# EAGLE board Spring2020 (EAGLE 9.6.2)
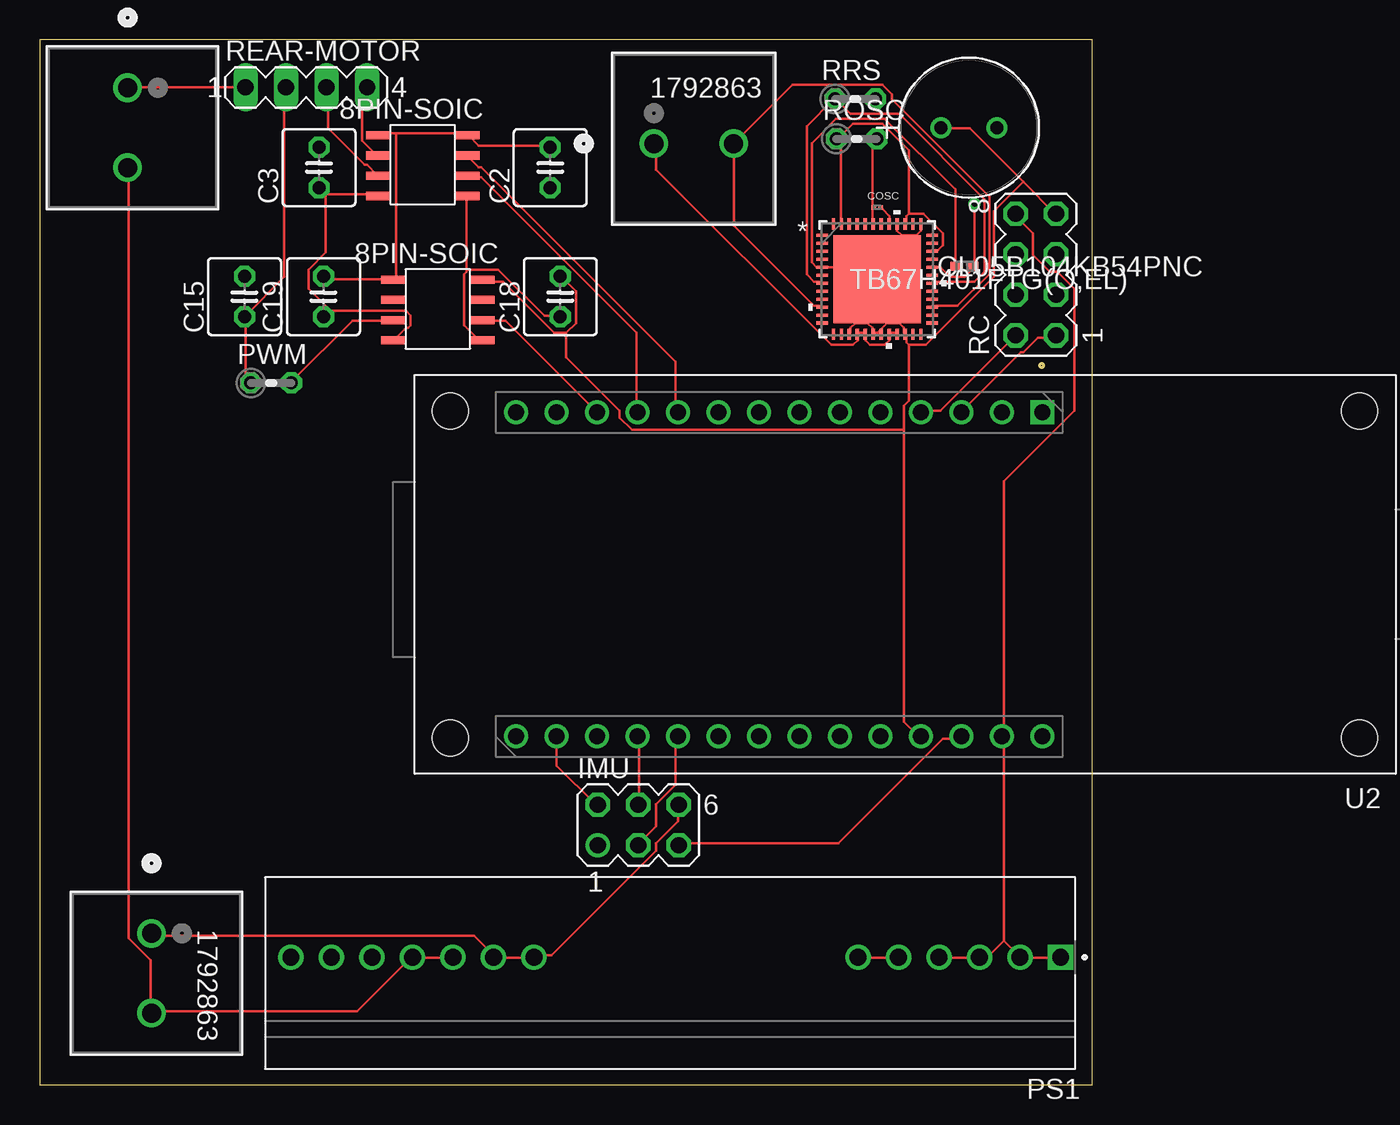
[diagram p0: board, top side]
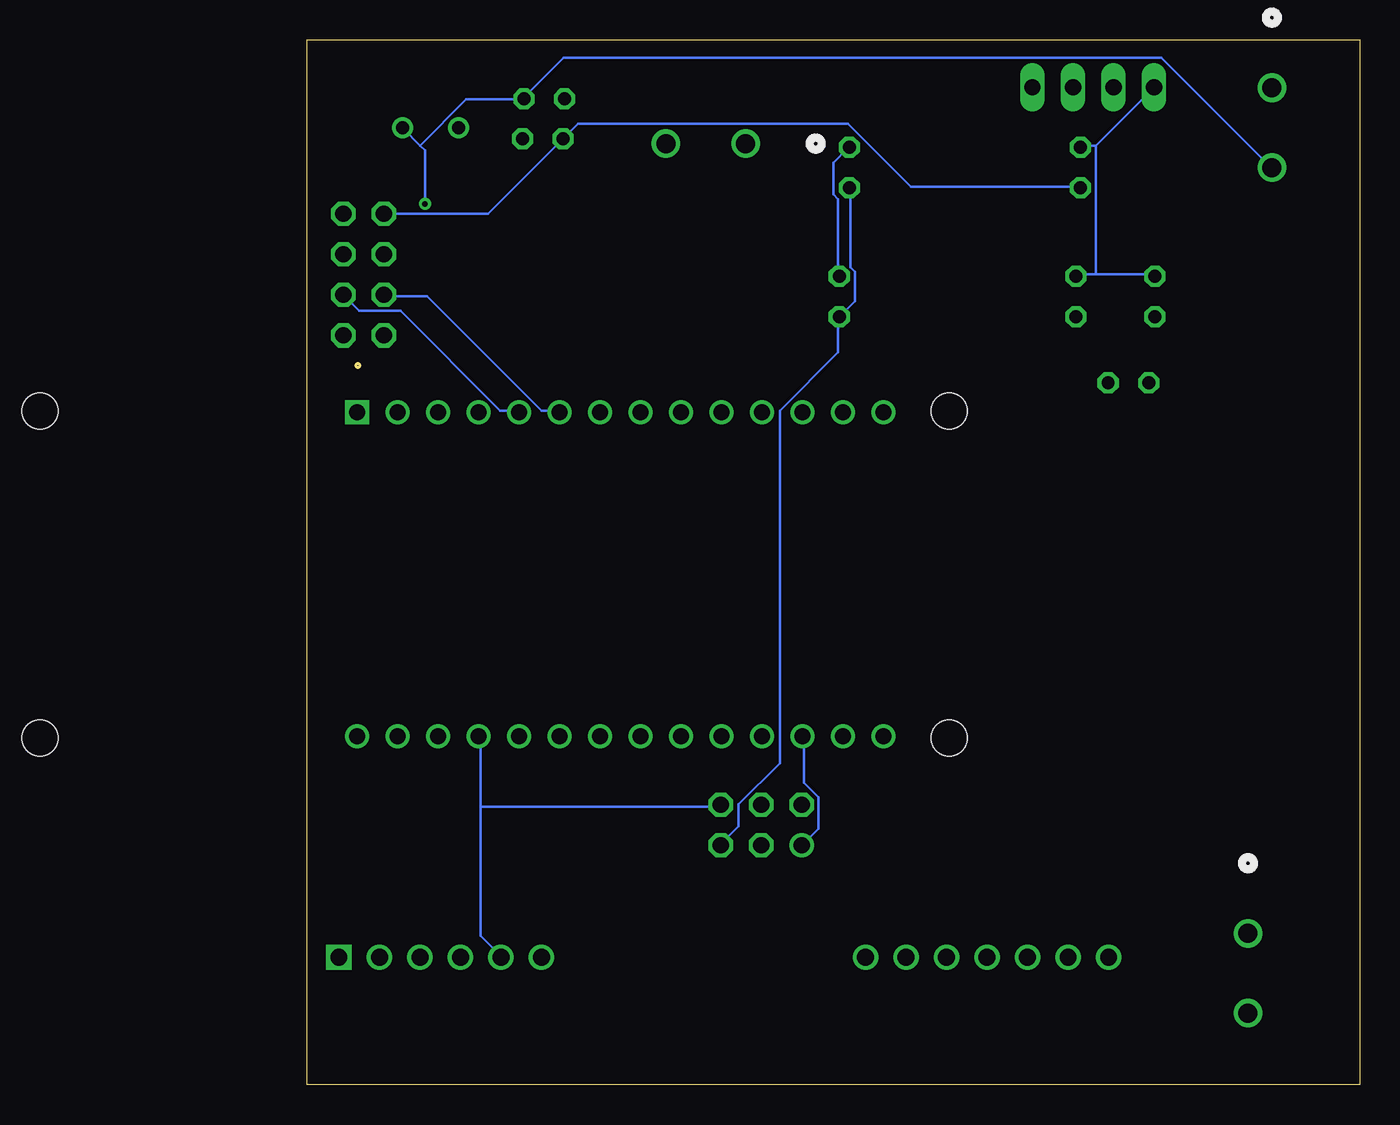
[diagram p1: board, bottom side, seen from below]

Size 66 x 65.5 mm. Coordinates in mm from the lower left corner, seen from the top.
Outline: 0,0 66,0 66,65.5 0,65.5 0,0
Copper layers (1*16): Top 0.035mm / dielectric 1.5mm / Bottom 0.035mm
Design rules "default": minimum track width 6mil, minimum drill 0.35mm, track to track 6mil, track to pad 6mil, pad to pad 6mil, via to via 6mil, smd to smd 6mil, copper to edge 40mil, drill to drill 6mil, minimum pad ring 10mil, minimum via ring 8mil, stop-mask expansion 4mil, vias tented up to drill 0mil, thermal gap 10mil

## Footprints (pad centres in the part's own frame; a part is rotated, then mirrored left to right if it is on the bottom)
C025-050X050 = drill 0.813 octagon: 1 -1.27,0; 2 1.27,0
CAPC0402X22N = smd 0.29 x 0.3: 1 -0.222,0; 2 0.222,0
CAP_4014_WRE = drill 0.813 pad 1.321: 1 0,0; 2 3.505,0
CAP_CL_05_SAM = smd 0.711 x 0.559: 1 -0.521,0; 2 0.521,0
CONN_1792863_PXC = drill 1.194 pad 1.702: 1 0,0; 2 5.004,0
MA03-2 = drill 1.016: 1 -2.54,-1.27 | drill 1.016 octagon: 2 -2.54,1.27; 3 0,-1.27; 4 0,1.27; 5 2.54,-1.27; 6 2.54,1.27
CONV_NID100-5 = drill 1.06 square: 1 0,0 | drill 1.06: 2 2.54,0; 3 5.08,0; 4 7.62,0; 5 10.16,0; 6 12.7,0; 7 33.02,0; 8 35.56,0; 9 38.1,0; 10 40.64,0; 11 43.18,0; 12 45.72,0; 13 48.26,0
0204V = drill 0.813 octagon: 1 -1.27,0; 2 1.27,0
RESC0402X15N = smd 0.29 x 0.3: 1 -0.222,0; 2 0.222,0
MA04-2 = drill 1.016 octagon: 1 -3.81,-1.27; 2 -3.81,1.27; 3 -1.27,-1.27; 4 -1.27,1.27; 5 1.27,-1.27; 6 1.27,1.27; 7 3.81,-1.27; 8 3.81,1.27
MA04-1 = drill 1.016 long: 1 -3.81,0; 2 -1.27,0; 3 1.27,0; 4 3.81,0
P-VQFN48-0707-0P50-004_TOS = smd 0.705 x 0.199: 1 -3.452,2.75; 2 -3.452,2.25; 3 -3.452,1.75; 4 -3.452,1.25; 5 -3.452,0.75; 6 -3.452,0.25; 7 -3.452,-0.25; 8 -3.452,-0.75; 9 -3.452,-1.25; 10 -3.452,-1.75; 11 -3.452,-2.25; 12 -3.452,-2.75; 25 3.452,-2.75; 26 3.452,-2.25; 27 3.452,-1.75; 28 3.452,-1.25; 29 3.452,-0.75; 30 3.452,-0.25; 31 3.452,0.25; 32 3.452,0.75; 33 3.452,1.25; 34 3.452,1.75; 35 3.452,2.25; 36 3.452,2.75 | smd 0.199 x 0.705: 13 -2.75,-3.452; 14 -2.25,-3.452; 15 -1.75,-3.452; 16 -1.25,-3.452; 17 -0.75,-3.452; 18 -0.25,-3.452; 19 0.25,-3.452; 20 0.75,-3.452; 21 1.25,-3.452; 22 1.75,-3.452; 23 2.25,-3.452; 24 2.75,-3.452; 37 2.75,3.452; 38 2.25,3.452; 39 1.75,3.452; 40 1.25,3.452; 41 0.75,3.452; 42 0.25,3.452; 43 -0.25,3.452; 44 -0.75,3.452; 45 -1.25,3.452; 46 -1.75,3.452; 47 -2.25,3.452; 48 -2.75,3.452 | smd 5.5 x 5.5: 49 0,0
ARDUINO_ABX00012 = drill 1 square: 1 22.135,2.34 | drill 1: 2 24.675,2.34; 3 27.215,2.34; 4 29.755,2.34; 5 32.295,2.34; 6 34.835,2.34; 7 37.375,2.34; 8 39.915,2.34; 9 42.455,2.34; 10 44.995,2.34; 11 47.535,2.34; 12 50.075,2.34; 13 52.615,2.34; 14 55.155,2.34; 15 55.155,22.66; 16 52.615,22.66; 17 50.075,22.66; 18 47.535,22.66; 19 44.995,22.66; 20 42.455,22.66; 21 39.915,22.66; 22 37.375,22.66; 23 34.835,22.66; 24 32.295,22.66; 25 29.755,22.66; 26 27.215,22.66; 27 24.675,22.66; 28 22.135,22.66 | hole 2.25: 2.25,2.25; 2.25,22.75; 59.25,22.75; 59.25,2.25
8PINSOIC = smd 1.524 x 0.508: 1 -2.794,2.286; 2 -2.794,1.016; 3 -2.794,-0.254; 4 -2.794,-1.524; 5 2.794,-1.524; 6 2.794,-0.254; 7 2.794,1.016; 8 2.794,2.286

## Placement (x,y rotation side)
C2  [C025-050X050]  32,57.5 90 top
C3  [C025-050X050]  17.5,57.5 90 top
C15  [C025-050X050]  12.83,49.41 90 top
C18  [C025-050X050]  32.63,49.41 90 top
C19  [C025-050X050]  17.78,49.41 90 top
COSC  GRM022R71A271KA01L  [CAPC0402X22N]  52.5,55 0 top
CVM1  860010674014  [CAP_4014_WRE]  56.5,60 0 top
CVM2  CL05B104KB54PNC  [CAP_CL_05_SAM]  57.98,51.3 0 top
FRT_MTR  1792863  [CONN_1792863_PXC]  38.5,59 0 top
IMU  [MA03-2]  37.52,16.29 0 top
PS1  NID100-5  [CONV_NID100-5]  64,8 180 top
PWM  68000  [0204V]  14.5,44 0 top
PWR_IN  1792863  [CONN_1792863_PXC]  7,9.5 270 top
R1  RC0100JR-075K1L  [RESC0402X15N]  -16,-6.5 0 top  (outside the outline)
RC  [MA04-2]  62.45,50.79 90 top
REAR-MOTOR  [MA04-1]  16.7,62.53 0 top
REAR_PWR  1792863  [CONN_1792863_PXC]  5.5,62.5 270 top
ROSC  5100  [0204V]  51.21,59.3 0 top
RRS  0.22  [0204V]  51.13,61.8 0 top
U1  TB67H401FTG(O,EL)  [P-VQFN48-0707-0P50-004_TOS]  52.5,50.5 0 top
U2  ABX00012  [ARDUINO_ABX00012]  85,44.5 180 top
U$2  IL-712  [8PINSOIC]  24,58 180 top
U$7  IL-712  [8PINSOIC]  24.95,48.95 180 top

## Library data of the parts
C2 C3 C15 C18 C19 = resistor
COSC R1 = SnapEDA Library
CVM1 = Test; COPYRIGHT: Copyright (C) 2022 Ultra Librarian. All rights reserved.; DIGI-KEY_PART_NUMBER_1: 732-8666-3-ND; DIGI-KEY_PART_NUMBER_2: 732-8666-1-ND; MANUFACTURER_PART_NUMBER: 860010674014; MFR_NAME: Wurth Electronics
CVM2 = Test; COPYRIGHT: Copyright (C) 2022 Ultra Librarian. All rights reserved.; DIGI-KEY_PART_NUMBER_1: 1276-CL05B104KB54PNCTR-ND; DIGI-KEY_PART_NUMBER_2: 1276-CL05B104KB54PNCCT-ND; DIGI-KEY_PART_NUMBER_3: 1276-CL05B104KB54PNCDKR-ND; MANUFACTURER_PART_NUMBER: CL05B104KB54PNC; MFR_NAME: Samsung
FRT_MTR PWR_IN REAR_PWR = Test; COPYRIGHT: Copyright (C) 2022 Ultra Librarian. All rights reserved.; DIGI-KEY_PART_NUMBER_1: 277-2518-ND; MANUFACTURER_PART_NUMBER: 1792863; MFR_NAME: Phoenix Contact
IMU RC REAR-MOTOR = con-lstb; OC_FARNELL: unknown; OC_NEWARK: unknown
PS1 = SnapEDA Library; MANUFACTURER: Meanwell; MAXIMUM_PACKAGE_HEIGHT: 27.5mm; PARTREV: 2020-10-20; STANDARD: IPC-7351B
PWM ROSC RRS = rcl; SPICEPREFIX: R
U1 = Test; COPYRIGHT: Copyright (C) 2022 Ultra Librarian. All rights reserved.; DIGI-KEY_PART_NUMBER_1: TB67H401FTG(OEL)TR-ND; DIGI-KEY_PART_NUMBER_2: TB67H401FTG(OEL)CT-ND; DIGI-KEY_PART_NUMBER_3: TB67H401FTG(OEL)DKR-ND; MANUFACTURER_PART_NUMBER: TB67H401FTG(O,EL); MFR_NAME: Toshiba Electronic Devices & Storage Co.
U2 = SnapEDA Library; MANUFACTURER: Arduino; PARTREV: 5; STANDARD: Manufacturer Recommendations
U$2 U$7 = Spring2016Optoisolator

## Nets
3.3V: C2.1 C18.1 IMU.5 U2.26 U$2.1 U$7.1
5V: C3.1 C19.1 PS1.1 PS1.2 PS1.3 PS1.4 RC.8 ROSC.1 U1.34 U1.39 U1.46 U1.47 U2.27 U$2.8 U$7.8
+5V: U2.28
BKPWR: CVM1.2 CVM2.2 PS1.9 PS1.10 PWR_IN.2 REAR_PWR.2 RRS.2 U1.32
CH1: RC.1 U2.3
CH2: RC.2 U2.4
CH3: RC.3 U2.5
CH4: RC.4 U2.6
CH5: RC.5
CH6: RC.6
F+: FRT_MTR.2 U1.10 U1.11 U1.26 U1.27
F-: FRT_MTR.1 U1.16 U1.17 U1.20 U1.21
GND: C2.2 C3.2 C15.2 C18.2 C19.2 COSC.2 CVM1.1 CVM2.1 IMU.6 PS1.5 PS1.6 PS1.7 PS1.8 PWR_IN.1 RC.7 REAR-MOTOR.1 REAR_PWR.1 U1.5 U1.15 U1.18 U1.19 U1.22 U1.37 U1.40 U1.41 U1.49 U2.25 U$2.4 U$2.5 U$7.4 U$7.5
I_1: U1.44
I_2: U1.45
IMU-CS: IMU.2 U2.16
MISO: IMU.3 U2.19
MOSI: IMU.1 U2.17
N$5: COSC.1 ROSC.2 U1.43
N$6: U2.20
N$7: U2.21
REAR-PWM: U2.12 U$7.2
REAR-PWMOUT: C15.1 PWM.1 REAR-MOTOR.2
REAR-PWMR/SERVO2: PWM.2 U$7.7
REAR-TIMER: REAR-MOTOR.4 U$2.6
REAR-TIMER-IN: U2.10 U$2.3
REVERSE: REAR-MOTOR.3 U$2.7
REVERSE_IN: U2.11 U$2.2
RS: RRS.1 U1.7 U1.8 U1.29 U1.30
SCK: IMU.4 U2.18
VREFA: U1.42

## Tracks (layer width: path | path; a pad name or v marks a point on that pad's centre or on a via)
3.3V
  Top 0.152: 26.76,51.11 26.76,50.95 26.6,50.8 26.6,47.6 27.67,46.53 U$7.1 | 26.76,51.11 26.76,55.68 U$2.1 | 26.76,51.11 28.74,51.11 31.63,48.21 32.55,48.21 C18.1 | U2.26 57.69,21.69 56.63,21.69 50.08,15.14 40.17,15.14 IMU.5
  Bottom 0.152: C2.1 31.94,56.14 31.94,51.26 31.63,50.95 31.63,49.13 32.55,48.21 C18.1 32.7,48.06 32.7,45.93 36.36,42.27 36.36,20.17 38.95,17.58 38.95,16.21 40.02,15.14 IMU.5
5V
  Top 0.152: PS1.4 56.48,7.98 58.91,7.98 PS1.3 59.07,8.13 59.52,8.13 60.44,9.04 | 60.44,9.04 60.44,21.69 U2.27 60.44,21.85 60.44,37.85 64.86,42.27 64.86,49.89 63.79,50.95 63.33,50.95 62.27,52.02 62.27,53.39 61.2,54.46 RC.8 | 60.44,9.04 61.35,8.13 PS1.2 61.5,7.98 63.94,7.98 PS1.1 | 17.92,55.83 21.12,55.83 U$2.8 | 17.92,55.83 17.61,56.14 C3.1 17.92,55.83 | 18.22,48.52 22.95,48.52 23.25,48.21 23.25,47.6 23.1,47.45 22.95,47.45 22.19,46.69 U$7.8 | 18.22,48.52 17.92,48.21 C19.1 18.22,48.52 | 17.92,55.83 17.92,52.17 16.85,51.11 16.85,49.89 18.22,48.52 | 54.49,54.61 55.41,54.61 56.63,53.39 56.63,52.63 56.32,52.33 56.02,52.33 U1.34 | 54.49,54.61 54.34,54.46 54.34,54 U1.39 | 50.23,54 50.68,54 U1.46 | 50.23,54 50.23,59.03 50.08,59.18 ROSC.1 50.08,59.34 50.99,60.25 52.82,60.25 54.49,58.58 54.49,54.61 | 50.23,54 U1.47
  Bottom 0.152: RC.8 61.05,54.61 54.65,54.61 50.08,59.18 ROSC.1 49.92,59.34 49.01,60.25 32.09,60.25 28.13,56.29 17.61,56.29 C3.1
BKPWR  (via drill 0.35)
  Top 0.152: PS1.9 25.84,7.98 23.41,7.98 PS1.10 23.25,7.98 19.9,4.62 7.1,4.62 PWR_IN.2 6.95,4.62 6.95,7.83 5.57,9.2 5.57,57.36 REAR_PWR.2 | U1.32 56.02,51.26 56.48,51.26 57.08,50.65 58,50.65 58.61,51.26 CVM2.2 58.61,51.41 v58.61,55.22
  Bottom 0.152: v58.61,55.22 58.61,58.58 58.91,58.88 | 58.91,58.88 59.98,59.95 CVM1.2 | 58.91,58.88 56.02,61.78 52.51,61.78 RRS.2 52.36,61.93 49.92,64.37 12.43,64.37 5.57,57.51 REAR_PWR.2
CH1
  Top 0.152: U2.3 57.85,42.27 61.5,45.93 61.66,45.93 62.57,46.84 63.64,46.84 RC.1
CH2
  Top 0.152: U2.4 55.26,42.27 56.48,42.27 61.05,46.84 RC.2
CH3
  Bottom 0.152: U2.5 52.82,42.27 53.89,42.27 60.13,48.52 62.72,48.52 63.64,49.43 RC.3
CH4
  Bottom 0.152: U2.6 50.23,42.27 51.29,42.27 58.46,49.43 61.05,49.43 RC.4
F+
  Top 0.152: U1.26 56.02,48.21 56.02,48.67 U1.27 56.02,48.82 57.54,48.82 59.52,50.8 59.52,55.68 53.43,61.78 53.43,62.08 52.82,62.69 47.18,62.69 43.52,59.03 FRT_MTR.2 43.52,58.88 43.52,53.85 48.55,48.82 49.01,48.82 U1.10 49.01,48.67 49.01,48.21 U1.11
F-
  Top 0.152: U1.21 53.73,47.15 53.28,47.15 U1.20 53.28,46.99 53.28,46.69 52.97,46.38 52.06,46.38 51.75,46.69 51.75,46.99 U1.17 51.75,47.15 51.29,47.15 U1.16 51.29,46.99 51.29,46.69 50.99,46.38 49.62,46.38 38.65,57.36 38.65,58.88 FRT_MTR.1
GND
  Top 0.152: 33.01,47.15 32.24,47.15 29.04,50.34 27.82,50.34 U$7.4 | 33.01,47.15 33.62,47.75 33.62,49.74 32.7,50.65 C18.2 | 22.34,59.64 26.76,59.64 U$2.4 26.91,59.49 27.52,58.88 31.94,58.88 C2.2 | 22.34,59.64 21.27,59.64 U$2.5 | C19.2 17.92,50.65 18.07,50.5 22.03,50.5 U$7.5 22.19,50.5 22.34,50.65 22.34,59.64 | REAR_PWR.1 5.57,62.54 REAR-MOTOR.1 | 61.66,56.59 63.64,54.61 RC.7 | 61.66,56.59 58.3,59.95 56.63,59.95 CVM1.1 | 51.9,47.75 51.14,47.75 50.84,47.45 50.84,47.15 U1.15 | 51.9,47.75 52.21,47.45 52.21,47.15 | 52.21,47.15 52.51,47.15 | 52.51,47.15 52.67,47.15 U1.19 | 52.21,47.15 U1.18 | 52.51,47.15 53.12,47.75 53.89,47.75 54.19,47.45 54.19,47.15 U1.22 54.34,46.99 54.34,46.53 54.49,46.38 | 53.28,54 53.28,54.46 52.82,54.92 COSC.2 | 53.28,54 53.73,54 U1.40 53.73,53.85 53.73,53.55 54.04,53.24 | 53.28,54 U1.41 | 54.04,53.24 54.95,53.24 55.26,53.55 55.26,53.85 U1.37 | 51.9,51.11 52.36,50.65 U1.49 | 51.9,51.11 51.75,51.26 49.16,51.26 U1.5 49.01,51.26 48.7,51.26 48.4,51.56 48.4,59.03 49.92,60.56 52.97,60.56 57.39,56.14 57.39,51.41 CVM2.1 | 51.9,51.11 54.04,53.24 | 51.9,51.11 U1.49 | 51.9,47.75 51.9,50.04 52.36,50.5 U1.49 | 61.66,56.59 59.83,54.77 59.83,50.65 55.56,46.38 54.49,46.38 | PS1.6 51.45,7.98 53.73,7.98 PS1.5 | IMU.6 40.02,17.43 40.02,16.51 38.65,15.14 38.65,14.68 32.09,8.13 31.02,8.13 PS1.7 30.87,7.98 28.59,7.98 PS1.8 28.43,8.13 27.22,9.35 7.1,9.35 PWR_IN.1 | 54.49,46.38 54.49,42.88 54.19,42.57 54.19,41.05 | 54.19,41.05 54.19,22.76 55.1,21.85 U2.25 | 33.01,47.15 33.01,45.62 36.36,42.27 36.36,41.81 37.12,41.05 54.19,41.05
  Bottom 0.152: C18.2 32.7,50.8 32.7,55.53 33.01,55.83 33.01,57.81 32.09,58.73 C2.2 | 16.55,50.8 17.77,50.8 C19.2 | 16.55,50.8 12.89,50.8 C15.2 | 16.55,58.88 17.46,58.88 C3.2 | 16.55,58.88 13.04,62.39 REAR-MOTOR.1 | 16.55,58.88 16.55,50.8 | 55.1,17.43 55.1,9.35 53.89,8.13 PS1.5 | 55.1,17.43 55.1,21.69 U2.25 | 55.1,17.43 40.17,17.43 IMU.6
IMU-CS
  Top 0.152: U2.16 32.4,21.69 32.4,20.02 34.84,17.58 IMU.2
MISO
  Top 0.152: U2.19 39.86,21.69 39.86,18.8 38.65,17.58 38.65,16.21 37.58,15.14 IMU.3
MOSI
  Bottom 0.152: U2.17 34.84,21.69 34.84,18.95 33.92,18.04 33.92,16.05 34.84,15.14 IMU.1
N$5
  Top 0.152: U1.43 52.21,54 52.21,54.92 COSC.1 52.21,55.07 52.21,59.03 52.36,59.18 ROSC.2
REAR-PWM
  Top 0.152: U$7.2 27.82,47.91 29.2,47.91 34.84,42.27 U2.12
REAR-PWMOUT
  Top 0.152: PWM.1 13.19,44.1 12.89,44.4 12.89,48.06 C15.1 12.89,48.21 15.33,50.65 15.33,62.39 REAR-MOTOR.2
REAR-PWMR/SERVO2
  Top 0.152: U$7.7 22.03,47.91 19.59,47.91 15.79,44.1 PWM.2
REAR-TIMER
  Top 0.152: U$2.6 21.12,58.27 20.2,59.18 20.2,62.08 20.51,62.39 REAR-MOTOR.4
REAR-TIMER-IN
  Top 0.152: U$2.3 26.91,58.12 27.52,57.51 27.67,57.51 39.86,45.32 39.86,42.27 U2.10
REVERSE
  Top 0.152: U$2.7 21.12,57.05 20.51,57.66 20.36,57.66 18.07,59.95 18.07,62.39 REAR-MOTOR.3
REVERSE_IN
  Top 0.152: U$2.2 26.91,56.9 27.67,56.9 37.43,47.15 37.43,42.27 U2.11
RS
  Top 0.152: U1.29 56.02,49.74 56.02,50.19 U1.30 56.02,50.34 58.61,50.34 59.22,50.95 59.22,55.53 53.89,60.86 50.84,60.86 49.92,61.78 RRS.1 49.77,61.78 48.09,60.1 48.09,50.8 48.55,50.34 49.01,50.34 U1.7 49.01,50.19 49.01,49.74 U1.8
SCK
  Top 0.152: U2.18 37.58,21.69 37.58,17.58 IMU.4